# EAGLE board Knights_of_Ren_pcb (EAGLE 9.7.0)
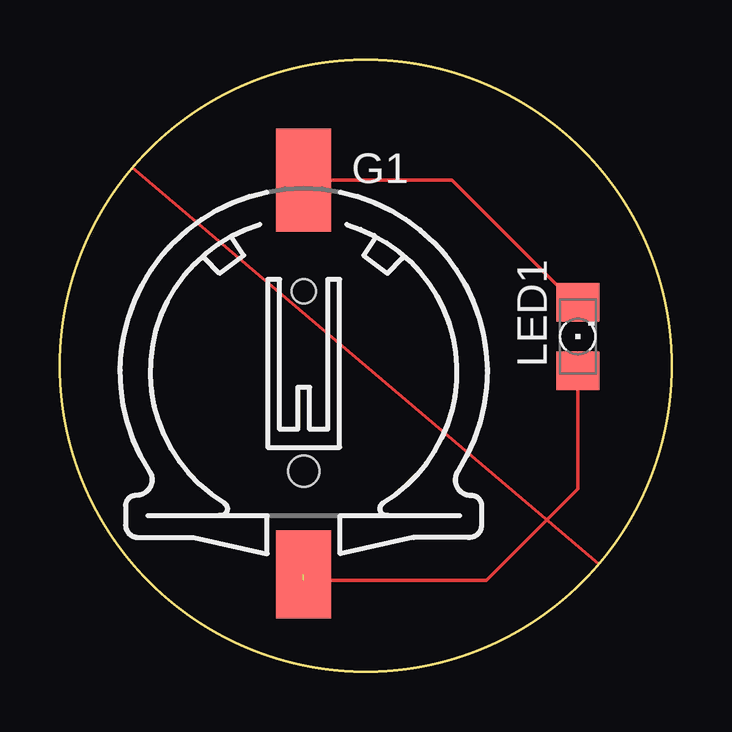
[diagram p0: board, top side]

Size 25.5 x 25.5 mm. Coordinates in mm from the lower left corner, seen from the top.
Outline: circle at 12.75,12.75 radius 12.75
Copper layers (1*16): Top 0.035mm / dielectric 1.5mm / Bottom 0.035mm
Design rules "default": minimum track width 6mil, minimum drill 0.35mm, track to track 6mil, track to pad 6mil, pad to pad 6mil, via to via 6mil, smd to smd 6mil, copper to edge 40mil, drill to drill 6mil, minimum pad ring 10mil, minimum via ring 8mil, stop-mask expansion 4mil, vias tented up to drill 0mil, thermal gap 10mil

## Footprints (pad centres in the part's own frame; a part is rotated, then mirrored left to right if it is on the bottom)
CH291-1220LF = smd 2.3 x 3.66: + 0,-2.296 | smd 2.3 x 4.3: - 0,14.146 | hole 1.3: 0,2 | hole 1: 0,9.5
1206 = smd 1.6 x 1.803: A -1.422,0; C 1.422,0

## Placement (x,y rotation side)
G1  CH291-1220LF  [CH291-1220LF]  10.16,6.35 0 top
LED1  [1206]  21.59,13.97 90 top

## Library data of the parts
G1 = battery
LED1 = led

## Nets
N$1: G1.- LED1.C
N$2: G1.+ LED1.A

## Tracks (layer width: path | path; a pad name or v marks a point on that pad's centre or on a via)
N$1
  Top 0.152: G1.- 16.33,20.5 21.44,15.39 LED1.C
N$2  (1 unrouted)
  Top 0.152: LED1.A 21.59,7.62 19.05,5.08 17.78,3.81 10.16,3.81
(copper drawn outside any net)
  shapes: Top area x1